# Altium PCB Glucometer-E.C.- Bluetooth Module.PcbDoc
Units mm, origin at the board's own origin, x right, y up, seen from the top; angles counter-clockwise.
Board outline 152.4 x 101.6 mm, 2 copper layers (Top Layer, Bottom Layer); 2 components, 8 nets, 39 pads, 0 vias.
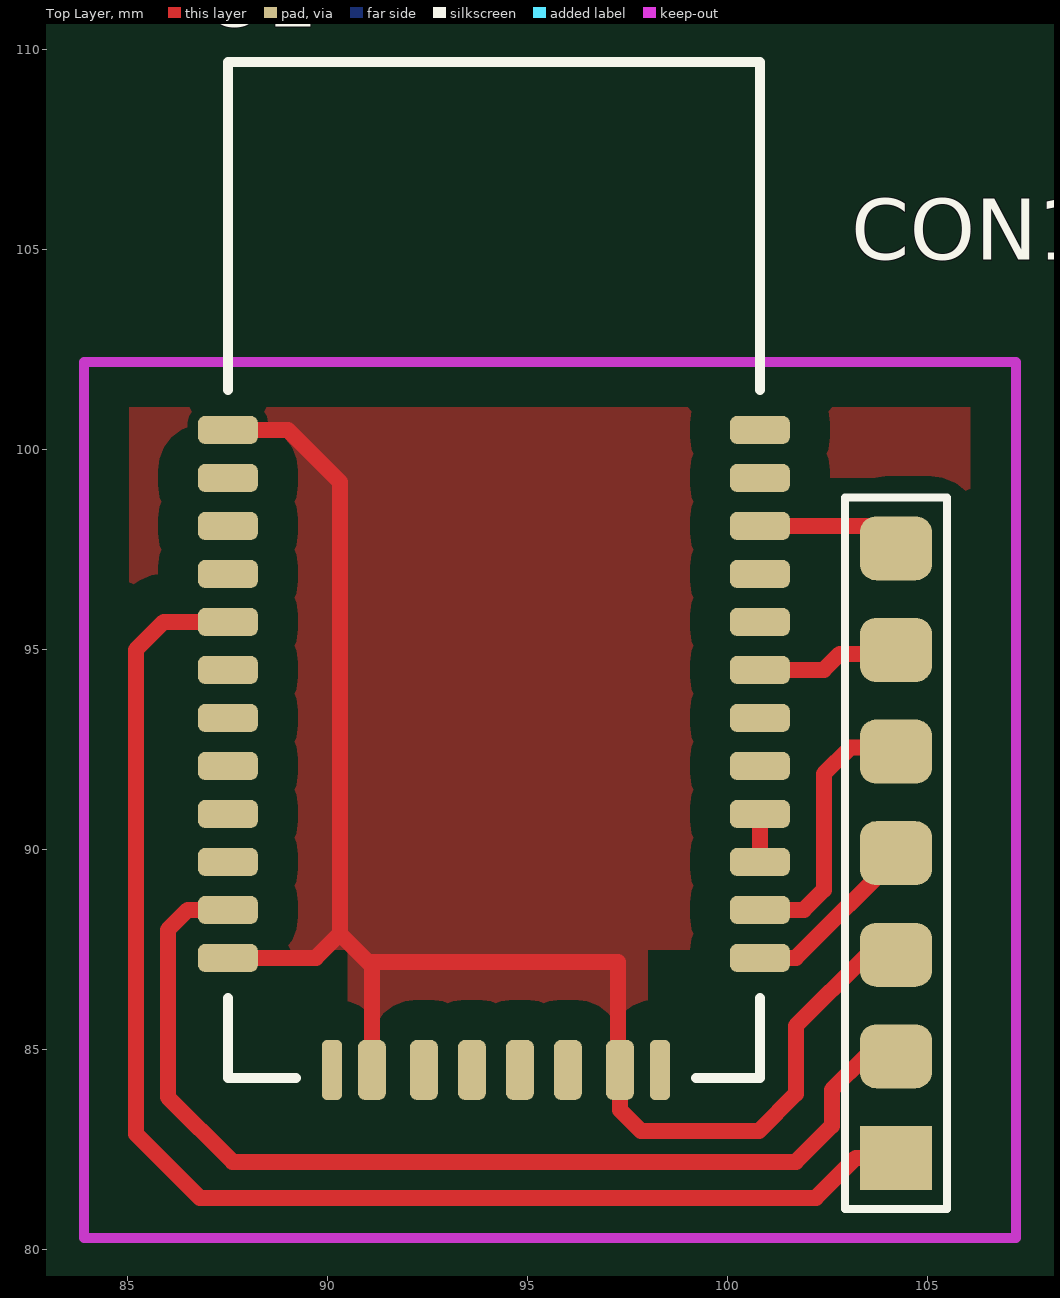
[diagram p0: Top Layer view]
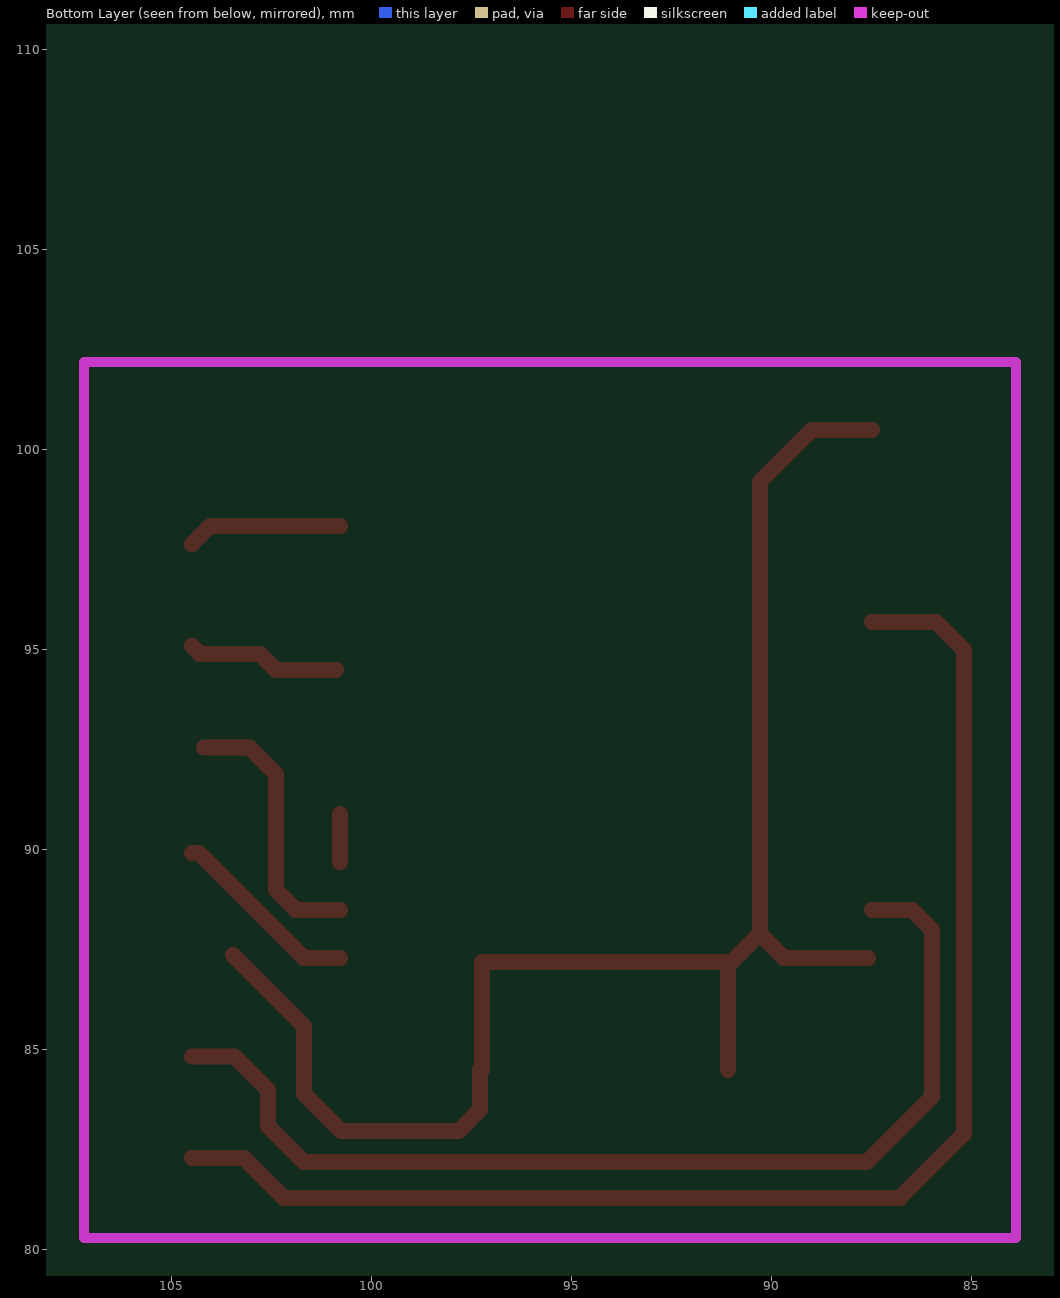
[diagram p1: Bottom Layer view, seen from below]

## Layer stack, top to bottom
Top Layer: signal copper 0.0356
Dielectric: dielectric 0.32, FR-4, Dk 4.8
Bottom Layer: signal copper 0.0356

## Board outline
25.4,25.4 177.8,25.4 177.8,127 25.4,127

## Design rules (kind name [scope] priority, off if disabled: settings)
Clearance [All] p1: gap=0.25
PolygonConnect [All] p1: connectstyle=Relief reliefconductorwidth=0.254 reliefentries=4 polygonreliefangle="90 Angle" airgapwidth=0.254
RoutingVias [All] p1: holewidth=0.711 width=1.27 viastyle="Through Hole" minholewidth=0.711 minwidth=1.27 maxholewidth=0.711 maxwidth=1.27
SolderMaskExpansion [All] p1: expansion=0.102
Width [All] p1: maxlimit=5 minlimit=0.25 preferedwidth=0.3 minimp=50.000000 maximp=50.000000 favimp=50.000000
28 further rules are at their usual default settings.

## Components (designator, comment, footprint, x,y, rotation, side; value= is the part's Value field where it differs from the comment)
CON1 "Header 7" HDR1X7 104.2,82.3 r90 top
U1 "RN42 Module" RN42-LAND 87.5,84.3 r0 top

## Footprints (in the part's own frame and the unit in brackets; to place one, negate y for a bottom-side part, rotate by r counter-clockwise, add the part's x,y. Pads: shape width x height; smd on the part's side, far side on the other; paste and mask are expansions set on the pad)
HDR1X7 [mm] "Connector; Header; 7 Position"
  rect 1.6x1.8 smd: 1(0,0)
  rrect50% 1.6x1.8 smd: 2(2.54,0) 3(5.08,0) 4(7.62,0) 5(10.16,0) 6(12.7,0) 7(15.24,0)
  silkscreen extent -1.27,-1.27 16.51,1.27
RN42-LAND [mm] "RN42 Footprint"
  rrect50% 1.5x0.7 smd: 1(0,16.2) 2(0,15) 3(0,13.8) 4(0,12.6) 5(0,11.4) 6(0,10.2) 7(0,9) 8(0,7.8) 9(0,6.6) 10(0,5.4) 11(0,4.2) 12(0,3) 13(13.3,3) 14(13.3,4.2) 15(13.3,5.4) 16(13.3,6.6) 17(13.3,7.8) 18(13.3,9) 19(13.3,10.2) 20(13.3,11.4) 21(13.3,12.6) 22(13.3,13.8) 23(13.3,15) 24(13.3,16.2)
  rrect50% 0.7x1.5 smd: 28(9.8,0.2) 29(3.6,0.2) 31(8.5,0.2) 32(7.3,0.2) 33(6.1,0.2) 34(4.9,0.2)
  rrect50% 0.5x1.5 smd: 30(10.8,0.2) 35(2.6,0.2)
  silkscreen extent 0,0 13.3,25.4

## Part data
CON1: "Header, 7-Pin"
U1: library part RN42MOD

## Nets (pads, with @x,y where several pads share a name; then routed paths per layer and width w, separated by ;. In a path a pad name is that pad's centre, name@x,y a point inside that pad or via, vN(x,y) a via of type N, cw(c..) or ccw(c..) an arc to the next point about the centre after c; other vN are vias at no path point)
GND: CON1.3 U1.1 U1.12 U1.28 U1.29 | length 40.4
  Top Layer w0.4: U1.1 89,100.5 90.3,99.2 90.3,87.9 ; U1.12@87.6,87.3 89.7,87.3 90.3,87.9 ; 91.05,87.15 90.3,87.9 ; U1.29 91.1,87.2 97.25,87.2 U1.28@97.25,84.5 ; U1.28 97.3,83.5 97.823,82.977 100.777,82.977 101.7,83.9 101.7,85.6 CON1.3@103.48,87.38
NetCON1_1: CON1.1 U1.5 | length 35.1
  Top Layer w0.4: U1.5 85.9,95.7 85.2,95 85.2,82.9 86.8,81.3 102.2,81.3 103.2,82.3 CON1.1@104.5,82.3
NetCON1_4: CON1.4 U1.13 | length 4.8
  Top Layer w0.4: U1.13 101.7,87.3 104.32,89.92 CON1.4@104.5,89.92
NetCON1_5: CON1.5 U1.14 | length 6.8
  Top Layer w0.4: U1.14 101.9,88.5 102.4,89 102.4,91.9 103.06,92.56 CON1.5@104.2,92.56
NetCON1_6: CON1.6 U1.19 | length 3.8
  Top Layer w0.4: U1.19@100.9,94.5 102.4,94.5 102.8,94.9 104.3,94.9 CON1.6@104.5,95.1
NetCON1_7: CON1.7 U1.22 | length 3.9
  Top Layer w0.4: U1.22 104.04,98.1 CON1.7@104.5,97.64
NetU1_15: U1.15 U1.16 | length 1.2
  Top Layer w0.4: U1.15 U1.16
VCC: CON1.2 U1.11 | length 26.7
  Top Layer w0.4: U1.11 86.5,88.5 86,88 86,83.819 87.619,82.2 101.7,82.2 102.6,83.1 102.6,84 103.44,84.84 CON1.2@104.5,84.84
pads on no net: U1.2 U1.3 U1.4 U1.6 U1.7 U1.8 U1.9 U1.10 U1.17 U1.18 U1.20 U1.21 U1.23 U1.24 U1.30 U1.31 U1.32 U1.33 U1.34 U1.35

## Polygon pours and split planes (outlines as drawn)
GND on Top Layer "Bottom Layer-No Net" (solid, pour order 4): 106.3,87.5 98,87.5 98,81.2 98.1,81.1 90.5,81.1 90.5,87.5 84.7,87.5 84.7,101.3 106.3,101.3

## Keep-outs
Keep-Out Layer:
  lines w0.254: 83.9,80.3 83.9,102.2 107.2,102.2 107.2,80.3 83.9,80.3

## Dimensions
83.9,80.3 to 107.2,80.3 on Keep-Out Layer
107.2,80.3 to 107.2,102.2 on Keep-Out Layer